# Altium PCB QBW01.PcbDoc
Units mm, origin at the board's own origin, x right, y up, seen from the top; angles counter-clockwise.
Board outline 97.28 x 55.37 mm, 2 copper layers (Top Layer, Bottom Layer); 30 components, 9 nets, 80 pads, 134 vias.
Unrouted connection lines stored in the file: 13.
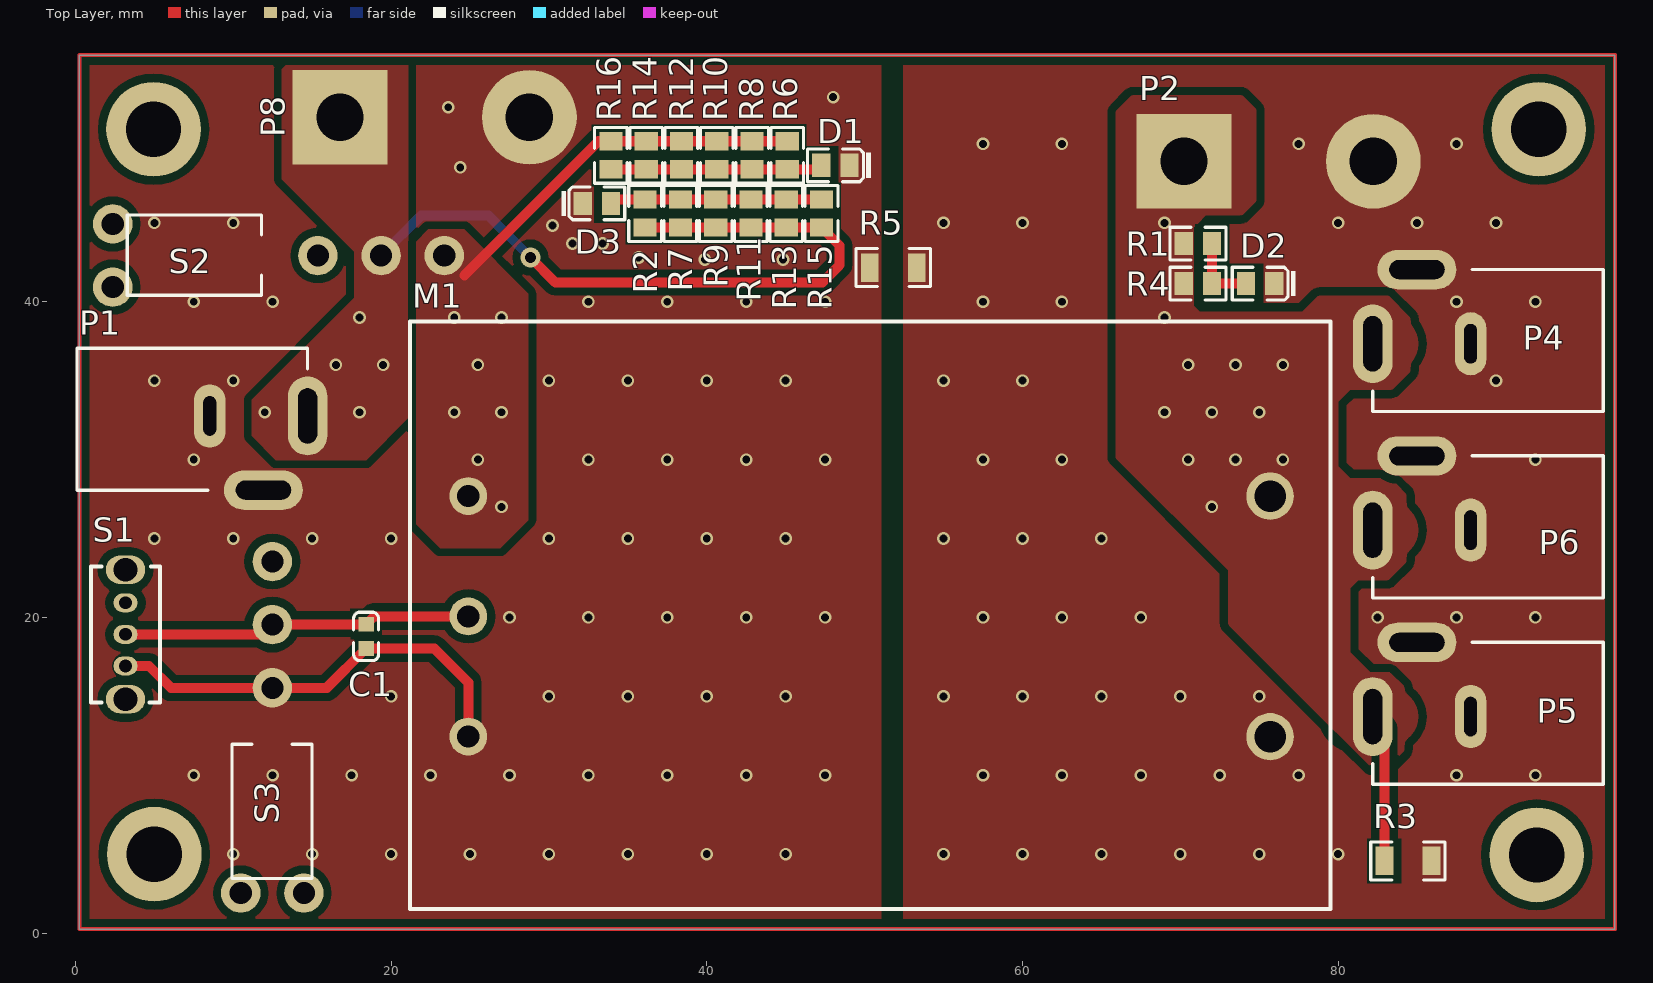
[diagram p0: Top Layer view]
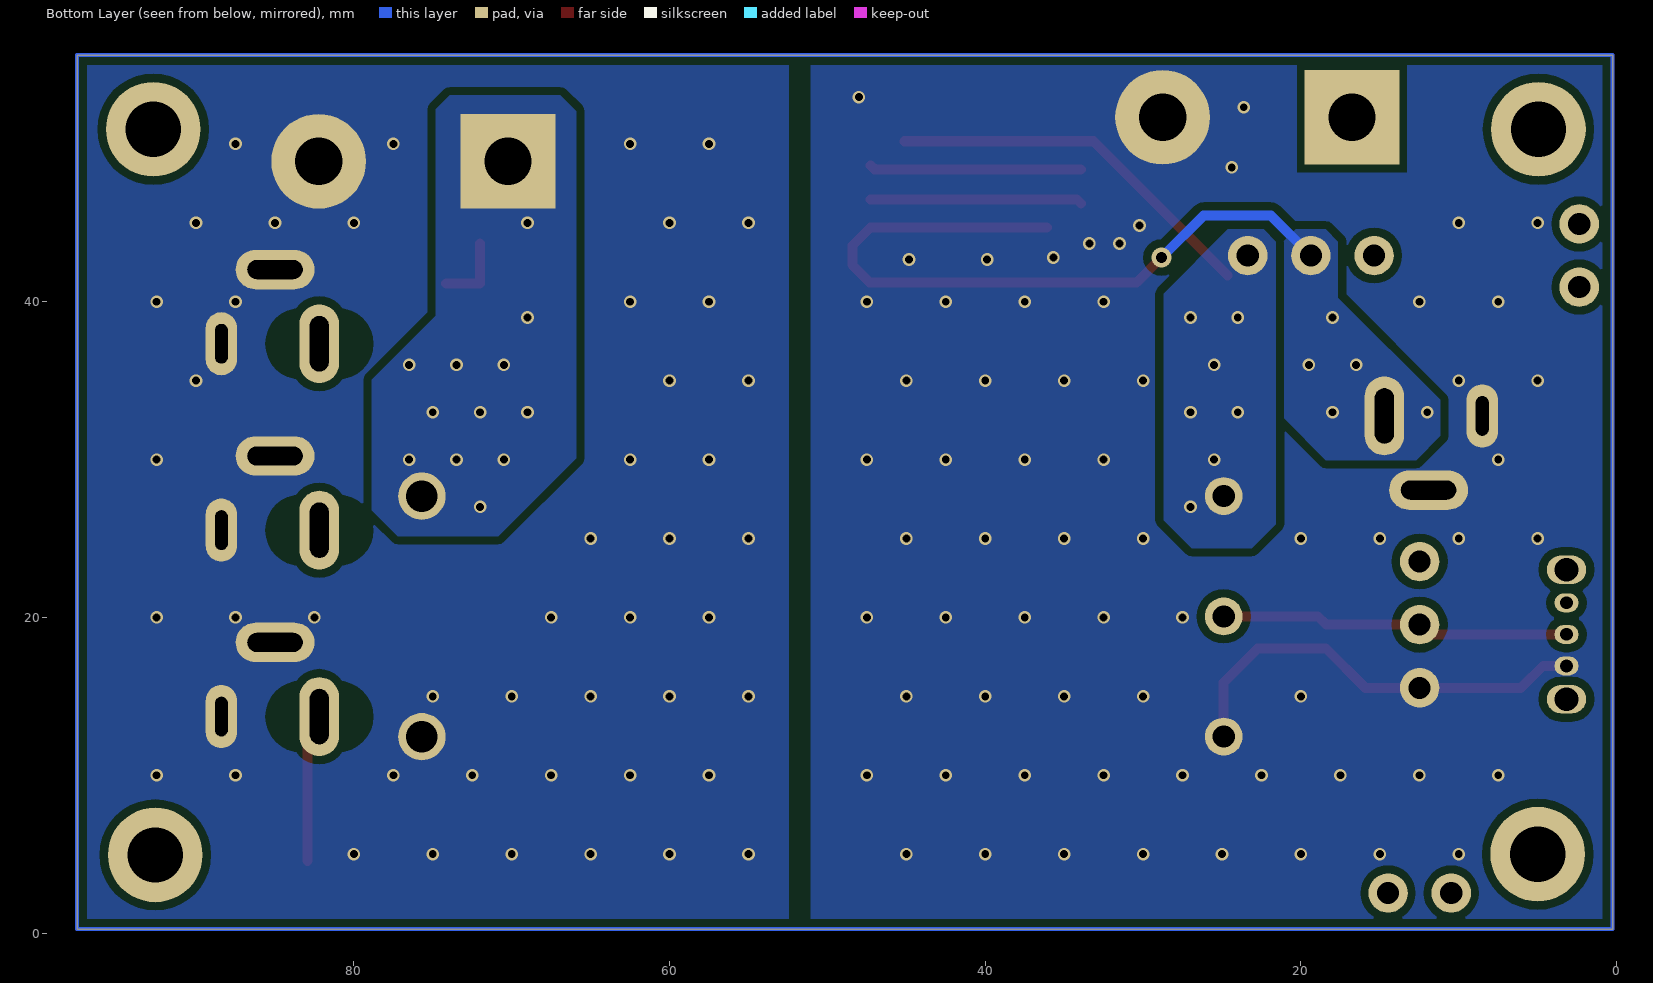
[diagram p1: Bottom Layer view, seen from below]
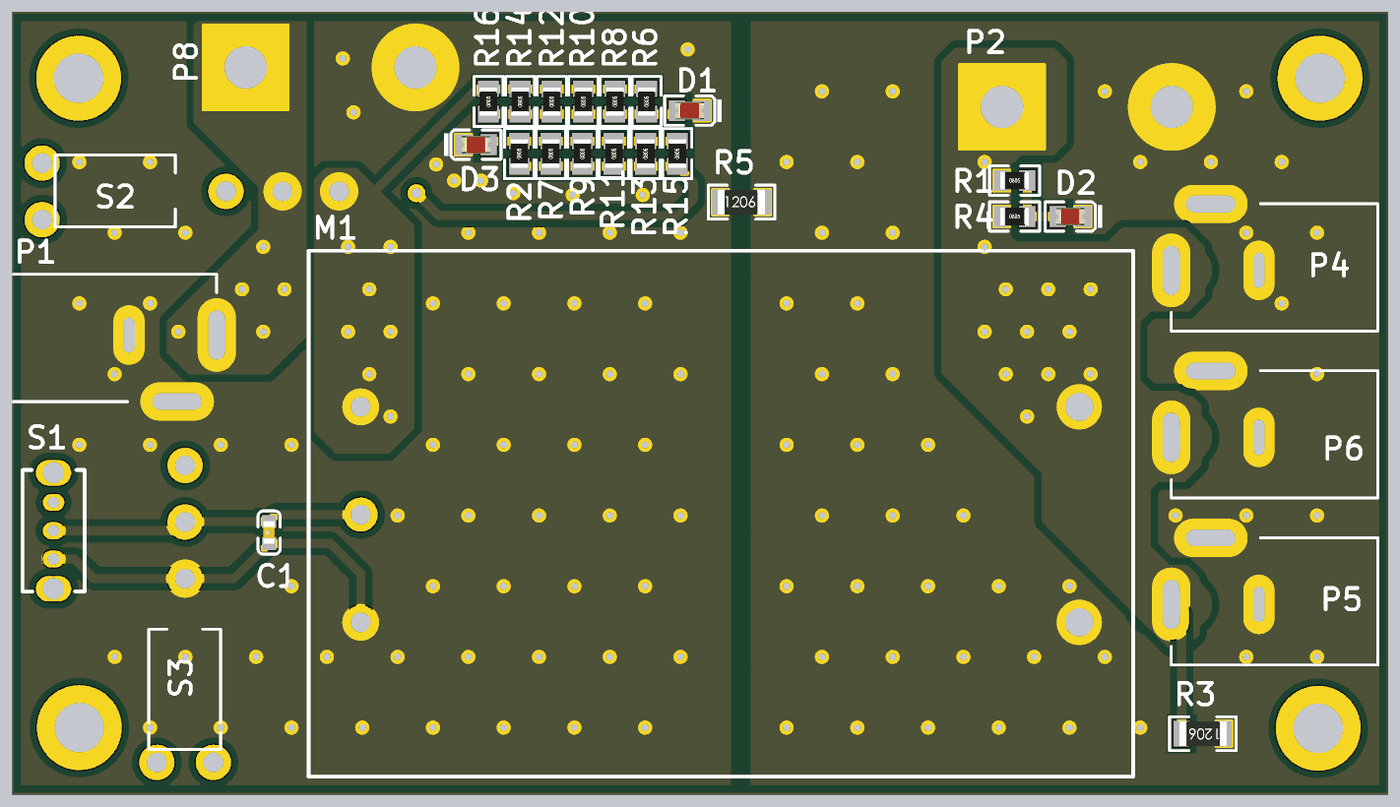
[diagram p2: 3D render of the assembled board from above, using the file's embedded part models]

## Layer stack, top to bottom
Top Solder: solder mask 0.0102, Solder Resist, Dk 3.5
Top Layer: signal copper 0.254
Dielectric 1: dielectric 0.32, FR-4, Dk 4.8
Bottom Layer: signal copper 0.254
Bottom Solder: solder mask 0.0102, Solder Resist, Dk 3.5

## Board outline
0.254,0.254 97.536,0.254 97.536,55.626 0.254,55.626

## Design rules (kind name [scope] priority, off if disabled: settings)
Clearance [All] p1: gap=0.508 ignorepadtopadclearanceinfootprint=FALSE
PlaneConnect [All] p1: planeconnectstyle=Direct reliefexpansion=0.508 reliefentries=4 reliefconductorwidth=0.254 reliefairgap=0.254
PolygonConnect [All] p1: connectstyle=Direct reliefconductorwidth=0.254 reliefentries=4 polygonreliefangle="90 Angle" airgapwidth=0.254
RoutingVias [All] p1: holewidth=0.711 width=1.27 viastyle="Through Hole" minholewidth=0.711 minwidth=1.27 maxholewidth=0.711 maxwidth=1.27
SolderMaskExpansion [All] p1: expansion=0.102
Width [All] p1: maxlimit=0.635 minlimit=0.635 preferedwidth=0.635
29 further rules are at their usual default settings.

## Components (designator, comment, footprint, x,y, rotation, side; value= is the part's Value field where it differs from the comment)
C1 "100nF (104) 10% 50V" 0603_C 18.415,18.796 r90 top
D1 "黄灯 0805" 0805_LED_S1 48.151,48.641 r180 top
D2 "黄灯 0805" 0805_LED_S1 75.058,41.148 r180 top
D3 "黄灯 0805" 0805_LED_S1 33.037,46.228 r0 top
M1 "QBW01" QBW01 24.892,27.686 r0 top
P1 "Header 3" PCBComponent_1 8.513,32.766 r270 top
P2 "Header 2" "Header 1X2" 70.231,48.895 r0 top
P4 "Header 3" PCBComponent_1 88.392,37.338 r90 top
P5 "Header 3" PCBComponent_1 88.392,13.716 r90 top
P6 "Header 3" PCBComponent_1 88.392,25.527 r90 top
P8 "Header 2" "Header 1X2" 16.764,51.689 r0 top
R1 "4.3KΩ (4301) ±1%" 0805_R 71.119,43.688 r0 top
R2 "4.3KΩ (4301) ±1%" 0805_R 36.093,45.592 r90 top
R3 "DNC-FAN" 1206_R 84.421,4.572 r180 top
R4 "4.3KΩ (4301) ±1%" 0805_R 71.119,41.148 r0 top
R5 "DNC" 1206_R 51.816,42.164 r0 top
R6 "4.3KΩ (4301) ±1%" 0805_R 45.102,49.277 r90 top
R7 "4.3KΩ (4301) ±1%" 0805_R 38.329,45.592 r90 top
R8 "4.3KΩ (4301) ±1%" 0805_R 42.867,49.277 r90 top
R9 "4.3KΩ (4301) ±1%" 0805_R 40.564,45.592 r90 top
R10 "4.3KΩ (4301) ±1%" 0805_R 40.632,49.277 r90 top
R11 "4.3KΩ (4301) ±1%" 0805_R 42.799,45.592 r90 top
R12 "4.3KΩ (4301) ±1%" 0805_R 38.397,49.276 r90 top
R13 "4.3KΩ (4301) ±1%" 0805_R 45.034,45.592 r90 top
R14 "4.3KΩ (4301) ±1%" 0805_R 36.162,49.276 r90 top
R15 "4.3KΩ (4301) ±1%" 0805_R 47.269,45.592 r90 top
R16 "4.3KΩ (4301) ±1%" 0805_R 33.926,49.277 r90 top
S1 "SW-SPDT" SWITCH-SS12D07 3.175,20.923 r180 top
S2 "SW-SPDT" SWITCH-YF 15.367,42.926 r90 top
S3 "SW-SPDT" SWITCH-YF 12.478,15.54 r180 top

## Footprints (in the part's own frame and the unit in brackets; to place one, negate y for a bottom-side part, rotate by r counter-clockwise, add the part's x,y. Pads: shape width x height; smd on the part's side, far side on the other; paste and mask are expansions set on the pad)
0603_C [mm]
  rect 0.93x0.98 smd: 1(-0.77,0) 2(0.77,0)
  silkscreen extent -1.53,-0.79 1.54,0.79, body extent -0.8,-0.4 0.8,0.4, height 0.3
0805_LED_S1 [mm]
  rect 1.16x1.47 smd: A(0.89,0) K(-0.89,0)
  silkscreen extent -2.24,-1.04 1.77,1.03, body extent -1.01,-0.62 1.01,0.62, height 1.1
0805_R [mm]
  rect 1.16x1.47 smd: 1(-0.89,0) 2(0.89,0)
  silkscreen extent -1.77,-1.04 1.77,1.03, body extent -1,-0.62 1,0.63, height 0.49
1206_R [mm]
  rect 1.13x1.8 smd: 1(-1.49,0) 2(1.49,0)
  silkscreen extent -2.36,-1.2 2.35,1.2, body extent -1.7,-0.86 1.65,0.87, height 0.85
"Header 1X2" [mm] "Circle6Hole3"
  rect 6x6 hole 3: 1(0,0)
  round 6 hole 3: 2(12,0)
PCBComponent_1 [mm]
  oval 5x2.5 hole 3.5 slot 1.2 at 90 deg: 1(0,6.2)
  oval 4x2 hole 2.5 slot 0.8 at 90 deg: 2(0,0)
  oval 2.5x5 hole 1.2 slot 3.5 at 90 deg: 3(4.7,3.4)
  silkscreen extent -4.29,-8.41 4.71,6.19
QBW01 [mm] "QBW0112V18ADCDC"
  round 2.4 hole 1.4: 1(0,0) 2(0,-7.62) 3(0,-15.24)
  round 3 hole 2: 4(50.8,0) 5(50.8,-15.24)
  silkscreen extent -3.68,-26.16 54.61,11.05
SWITCH-SS12D07 [mm] "拨动开关 单刀双掷"
  oval 1.524x1.2 hole 0.8: 1(0,0) 2(0,2) 3(0,4)
  oval 2.5x1.8 hole 1.5: 4(0,-2.1) 5(0,6.1)
  silkscreen extent -2.2,-2.3 2.2,6.3
SWITCH-YF [mm] "5A125V"
  round 2.5 hole 1.4: 1(0,0) 2(0,-4) 3(0,-8) M(-2,13) M(2,13)
  silkscreen extent -2.51,3.58 2.57,12.08

## Part data
C1: library part "0603 100nF (104) 10% 50V", "贴片电容", Package=0603, SuppliersPartNumber=C14663, ComponentLink1Description=供应商链接, ComponentLink1URL=http://www.szlcsc.com/product/details_15331.html, Supplier=LC
D1 D2 D3: library part "0805 黄灯", "发光二极管", Package=0805, SuppliersPartNumber=C2296, ComponentLink1Description=供应商链接, ComponentLink1URL=http://www.szlcsc.com/product/details_2669.html, Supplier=LC
P1 P4 P5 P6: "Header, 3-Pin", LatestRevisionDate=17-Jul-2002, LatestRevisionNote="Re-released for DXP Platform.", Publisher="Altium Limited"
P2 P8: "Header, 2-Pin", LatestRevisionDate=17-Jul-2002, LatestRevisionNote="Re-released for DXP Platform.", Publisher="Altium Limited"
R1 R2 R4 R6 R7 R8 R9 R10 R11 R12 R13 R14 R15 R16: library part "0805 4.3KΩ (4301) 1%", "贴片电阻", Package=0805, SuppliersPartNumber=C17667, ComponentLink1Description=供应商链接, ComponentLink1URL=http://www.szlcsc.com/product/details_18355.html, Supplier=LC
R3 R5: library part "1206 1KΩ (1001) 1%", "贴片电阻", Package=1206, SuppliersPartNumber=C4410, ComponentLink1Description=供应商链接, ComponentLink1URL=http://www.szlcsc.com/product/details_4817.html, Supplier=LC
S1 S2 S3: "SPDT Subminiature Toggle Switch, Right Angle Mounting, Vertical Actuation", ComponentLink1Description="Manufacturer Link", ComponentLink1URL=http://www.apem.com, DatasheetVersion=05-Dec-2000, LatestRevisionDate=17-Dec-2003, LatestRevisionNote="Schematic revised, PCB Footprint replaced.", PackageDescription="Switch; 4 Leads", PackageReference=TL36WW15050, Published=24-Mar-1999, Publisher="Altium Limited"

## Free pads (board coordinates)
  round 6 hole 3.5: 5(4.953,50.927) 5(5,5) 5(92.583,4.953) 5(92.71,50.927)

## Via types
v1: diameter 0.8, hole 0.5, Top Layer to Bottom Layer, 133 vias
v2: diameter 1.27, hole 0.711, Top Layer to Bottom Layer, 1 vias

## Nets (pads, with @x,y where several pads share a name; then routed paths per layer and width w, separated by ;. In a path a pad name is that pad's centre, name@x,y a point inside that pad or via, vN(x,y) a via of type N, cw(c..) or ccw(c..) an arc to the next point about the centre after c; other vN are vias at no path point)
Enable: C1.2 M1.2 S1.2 S3.2 | length 22.2
  Top Layer w0.635: S1.2 11.861,18.923 S3.2 12.504,19.566 C1.2 18.915,20.066 M1.2
NetD2_A: D2.A R1.2 R4.2 | length 4.7
  Top Layer w0.635: R1.2 R4.2 D2.A
PowerGND: C1.1 D1.K D3.K M1.3 P1.2 P1.3 P8.2 R5.1 S1.3 S3.1 | length 27.6
  Top Layer w0.635: S1.3 4.667,16.923 6.05,15.54 S3.1 15.929,15.54 C1.1 22.741,18.026 24.892,15.875 M1.3
  other v1: 10,5 15,5 20,5 25,5 30,5 35,5 40,5 45,5 7.5,10 12.5,10 17.5,10 22.5,10 27.5,10 32.5,10 37.5,10 42.5,10 47.5,10 20,15 30,15 35,15 40,15 45,15 27.5,20 32.5,20 37.5,20 42.5,20 47.5,20 5,25 10,25 15,25 20,25 30,25 35,25 40,25 45,25 7.5,30 32.5,30 37.5,30 42.5,30 47.5,30 5,35 10,35 30,35 35,35 40,35 45,35 7.5,40 12.5,40 32.5,40 37.5,40 42.5,40 47.5,40 39.878,42.672 44.831,42.672 35.687,42.799 31.496,43.688 33.401,43.688 30.226,44.831 5,45 10,45 24.384,48.514 23.622,52.324 48.006,52.959
PowerGND2: D2.K M1.5 P2.2 P4.2 P4.3 P5.2 P5.3 P6.2 P6.3 R3.1 R5.2
  other v1: 55,5 60,5 65,5 70,5 75,5 80,5 57.5,10 62.5,10 67.5,10 72.5,10 77.5,10 87.5,10 92.5,10 55,15 60,15 65,15 70,15 75,15 57.5,20 62.5,20 67.5,20 82.5,20 87.5,20 92.5,20 55,25 60,25 65,25 57.5,30 62.5,30 92.5,30 55,35 60,35 90,35 57.5,40 62.5,40 87.5,40 92.5,40 55,45 60,45 80,45 85,45 90,45 57.5,50 62.5,50 77.5,50 87.5,50
PowerIN: M1.1 R6.2 R8.2 R10.2 R12.2 R14.2 R16.2 S2.3 | length 24
  Top Layer w0.635: 24.638,41.656 33.149,50.167 R16.2 R10.2 R8.2 R6.2
  other v1: 27,27 25.5,30 24,33 27,33 25.5,36 24,39 27,39
PowerOUT: M1.4 P2.1 P4.1 P5.1 P6.1 R1.1 R3.2 R4.1 | length 9.5
  Top Layer w0.635: P5.1 82.931,12.977 R3.2
  other v1: 72,27 70.5,30 73.5,30 76.5,30 69,33 72,33 75,33 70.5,36 73.5,36 76.5,36 69,39 69,45
RES1: P1.1 P8.1 R2.1 R7.1 R9.1 R11.1 R13.1 R15.1 S2.2 | length 46.3
  Top Layer w0.635: v2(28.829,42.799) 30.402,41.226 47.322,41.226 48.41,42.314 48.41,43.561 R15.1 R13.1 R11.1 R9.1 R7.1 R2.1
  Bottom Layer w0.635: S2.2 21.907,45.466 26.162,45.466 v2(28.829,42.799)
  other v1: 12,33 18,33 16.5,36 19.5,36 18,39
RES2: D3.A R2.2 R7.2 R9.2 R11.2 R13.2 R15.2 | length 13.4
  Top Layer w0.635: D3.A 34.181,46.482 R2.2 R7.2 R9.2 R11.2 R13.2 R15.2
RES3: D1.A R6.1 R8.1 R10.1 R12.1 R14.1 R16.1 | length 13.4
  Top Layer w0.635: R16.1 R10.1 R8.1 R6.1 47.007,48.387 D1.A
pads on no net: S1.1 S1.4 S1.5 S2.1 S2.M S3.3 S3.M

## Polygon pours and split planes (outlines as drawn)
PowerGND on Top Layer "Top Layer-PowerGND" (solid, pour order 84): 0.762,55.118 0.762,0.762 51.054,0.762 51.054,55.118
PowerIN on Top Layer "Top Layer-PowerIN" (solid, pour order 30): 22.352,44.577 21.59,43.815 21.59,25.908 23.114,24.384 26.924,24.384 28.702,26.162 28.702,40.513 24.638,44.577
RES1 on Top Layer "Top Layer-RES1" (solid, pour order 82): 18.415,29.972 21.082,32.639 21.082,55.118 20.574,55.118 13.462,55.118 13.081,54.737 13.081,47.752 17.653,43.18 17.653,40.259 11.176,33.782 11.176,31.496 12.7,29.972
PowerGND2 on Top Layer "Top Layer-PowerGND2" (solid, pour order 74): 52.451,0.889 96.901,0.889 96.901,54.991 52.451,54.991
PowerOUT on Top Layer "Top Layer-PowerOUT" (solid, pour order 65): 82.042,10.541 83.185,10.541 85.344,12.7 85.344,14.478 83.312,16.51 82.042,16.51 80.772,17.78 80.772,21.844 81.28,22.352 83.312,22.352 85.344,24.384 85.344,26.797 83.312,28.829 80.772,28.829 80.01,29.591 80.01,33.655 80.772,34.417 83.947,34.417 85.344,35.814 85.344,38.608 83.566,40.386 78.74,40.386 77.724,39.37 71.247,39.37 70.866,39.751 70.866,44.704 71.628,45.466 73.914,45.466 74.803,46.355 74.803,52.197 73.914,53.086 66.929,53.086 65.913,52.07 65.913,30.099 73.025,22.987 73.025,19.558
PowerGND on Bottom Layer "Bottom Layer-PowerGND 1" (solid, pour order 86): 0.889,54.991 0.889,0.889 51.054,0.889 51.054,54.991
RES1 on Bottom Layer "Bottom Layer-RES1" (solid, pour order 70): 18.415,29.972 21.082,32.639 21.082,43.815 20.32,44.577 18.415,44.577 17.653,43.815 17.653,40.259 11.176,33.782 11.176,31.496 12.7,29.972
PowerGND2 on Bottom Layer "Bottom Layer-PowerGND2" (solid, pour order 76): 52.451,54.991 52.451,0.889 96.901,0.889 96.901,54.991
PowerOUT on Bottom Layer "Bottom Layer-PowerOUT" (solid, pour order 72): 66.929,53.086 65.913,52.07 65.913,30.099 70.866,25.146 77.216,25.146 78.867,26.797 78.867,35.052 74.803,39.116 74.803,52.197 73.914,53.086
PowerIN on Bottom Layer "Bottom Layer-PowerIN" (solid, pour order 28): 22.352,44.577 21.59,43.815 21.59,25.908 23.114,24.384 26.924,24.384 28.702,26.162 28.702,40.513 24.638,44.577

## Other copper
Multi-Layer:
  the board outline again, w0.254